# Altium PCB PCB1.PcbDoc
Units mm, origin at the board's own origin, x right, y up, seen from the top; angles counter-clockwise.
Board outline 37.97 x 33.27 mm, 2 copper layers (Top Layer, Bottom Layer); 2 components, 38 nets, 94 pads, 129 vias.
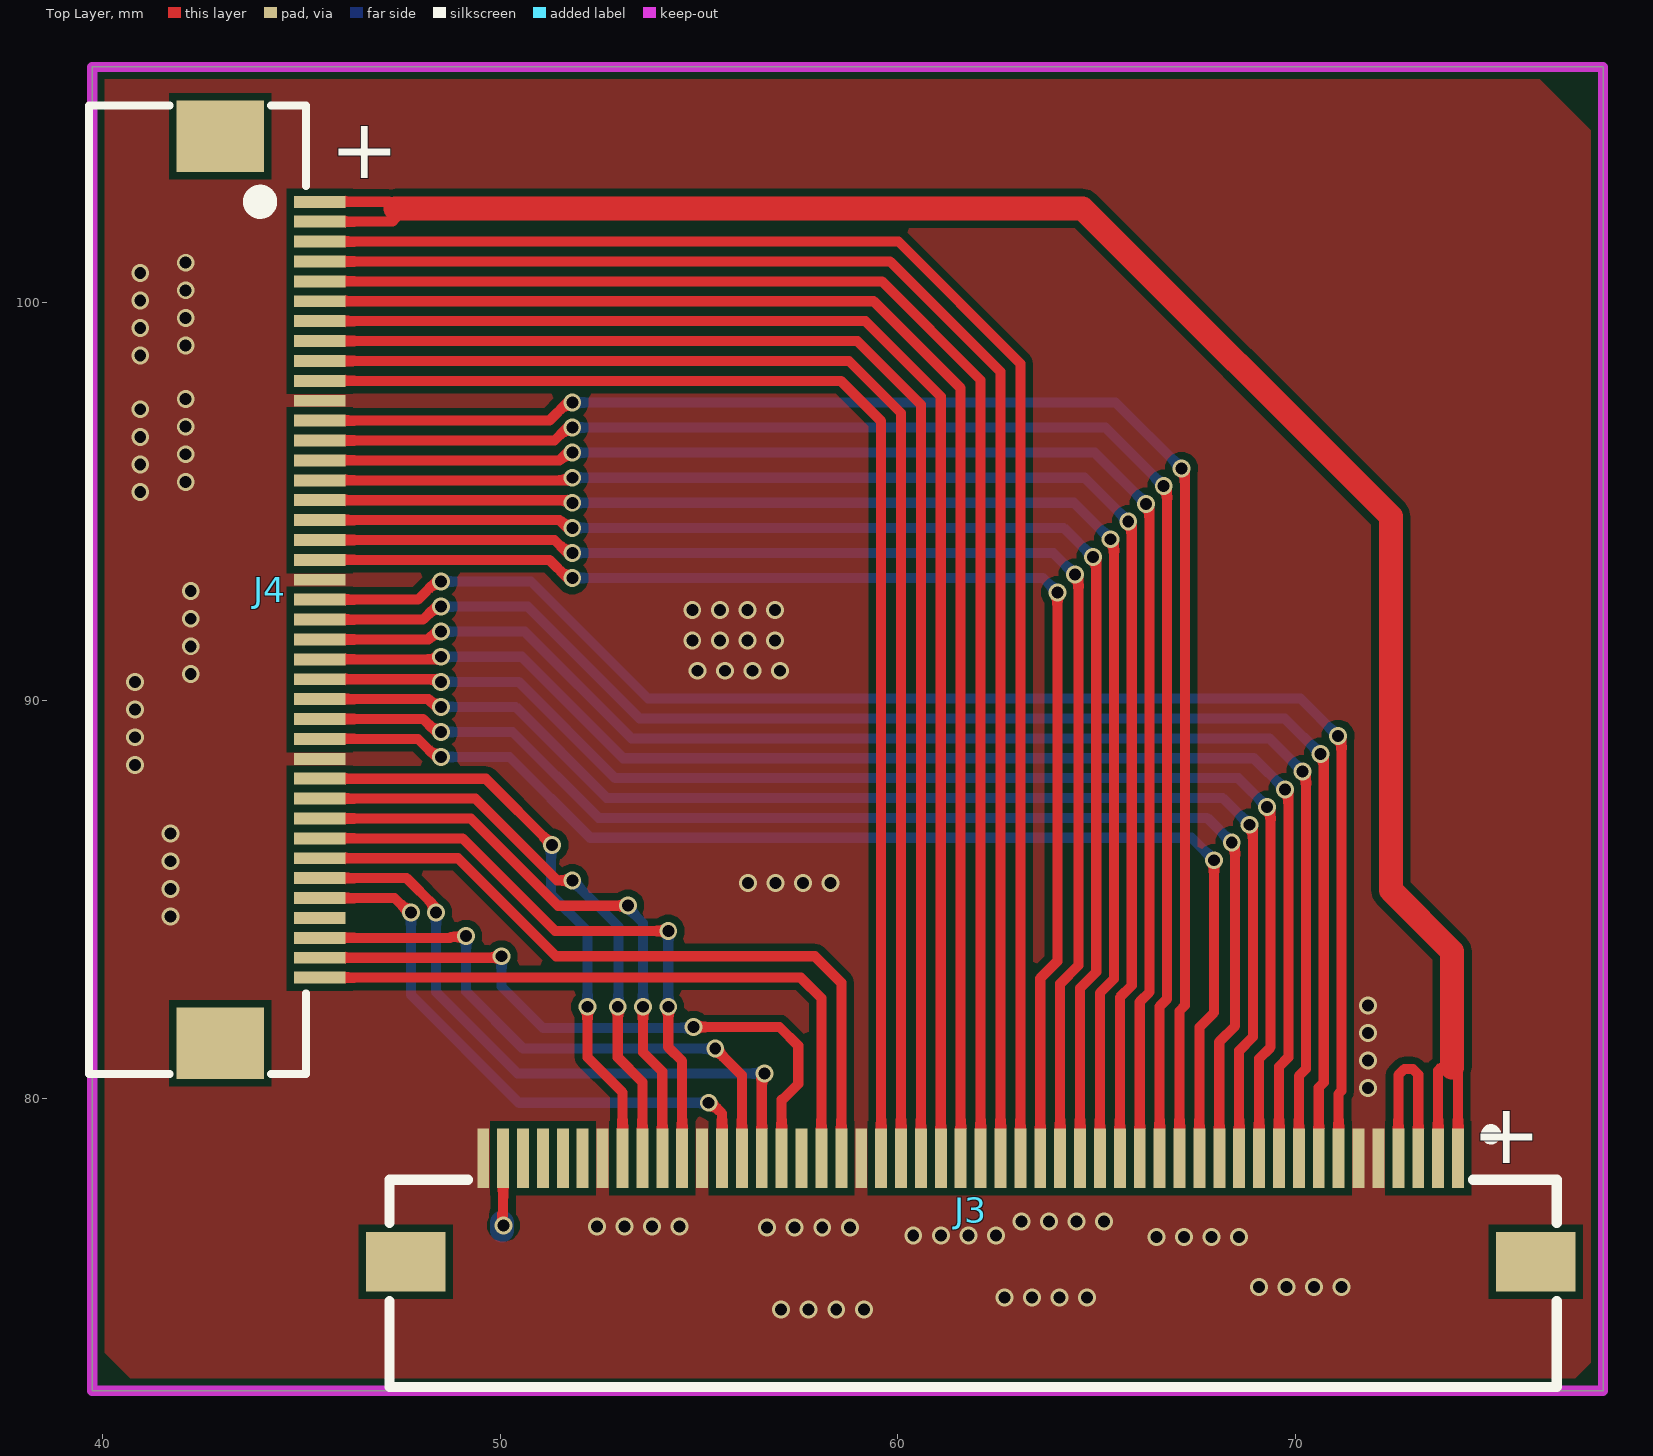
[diagram p0: Top Layer view]
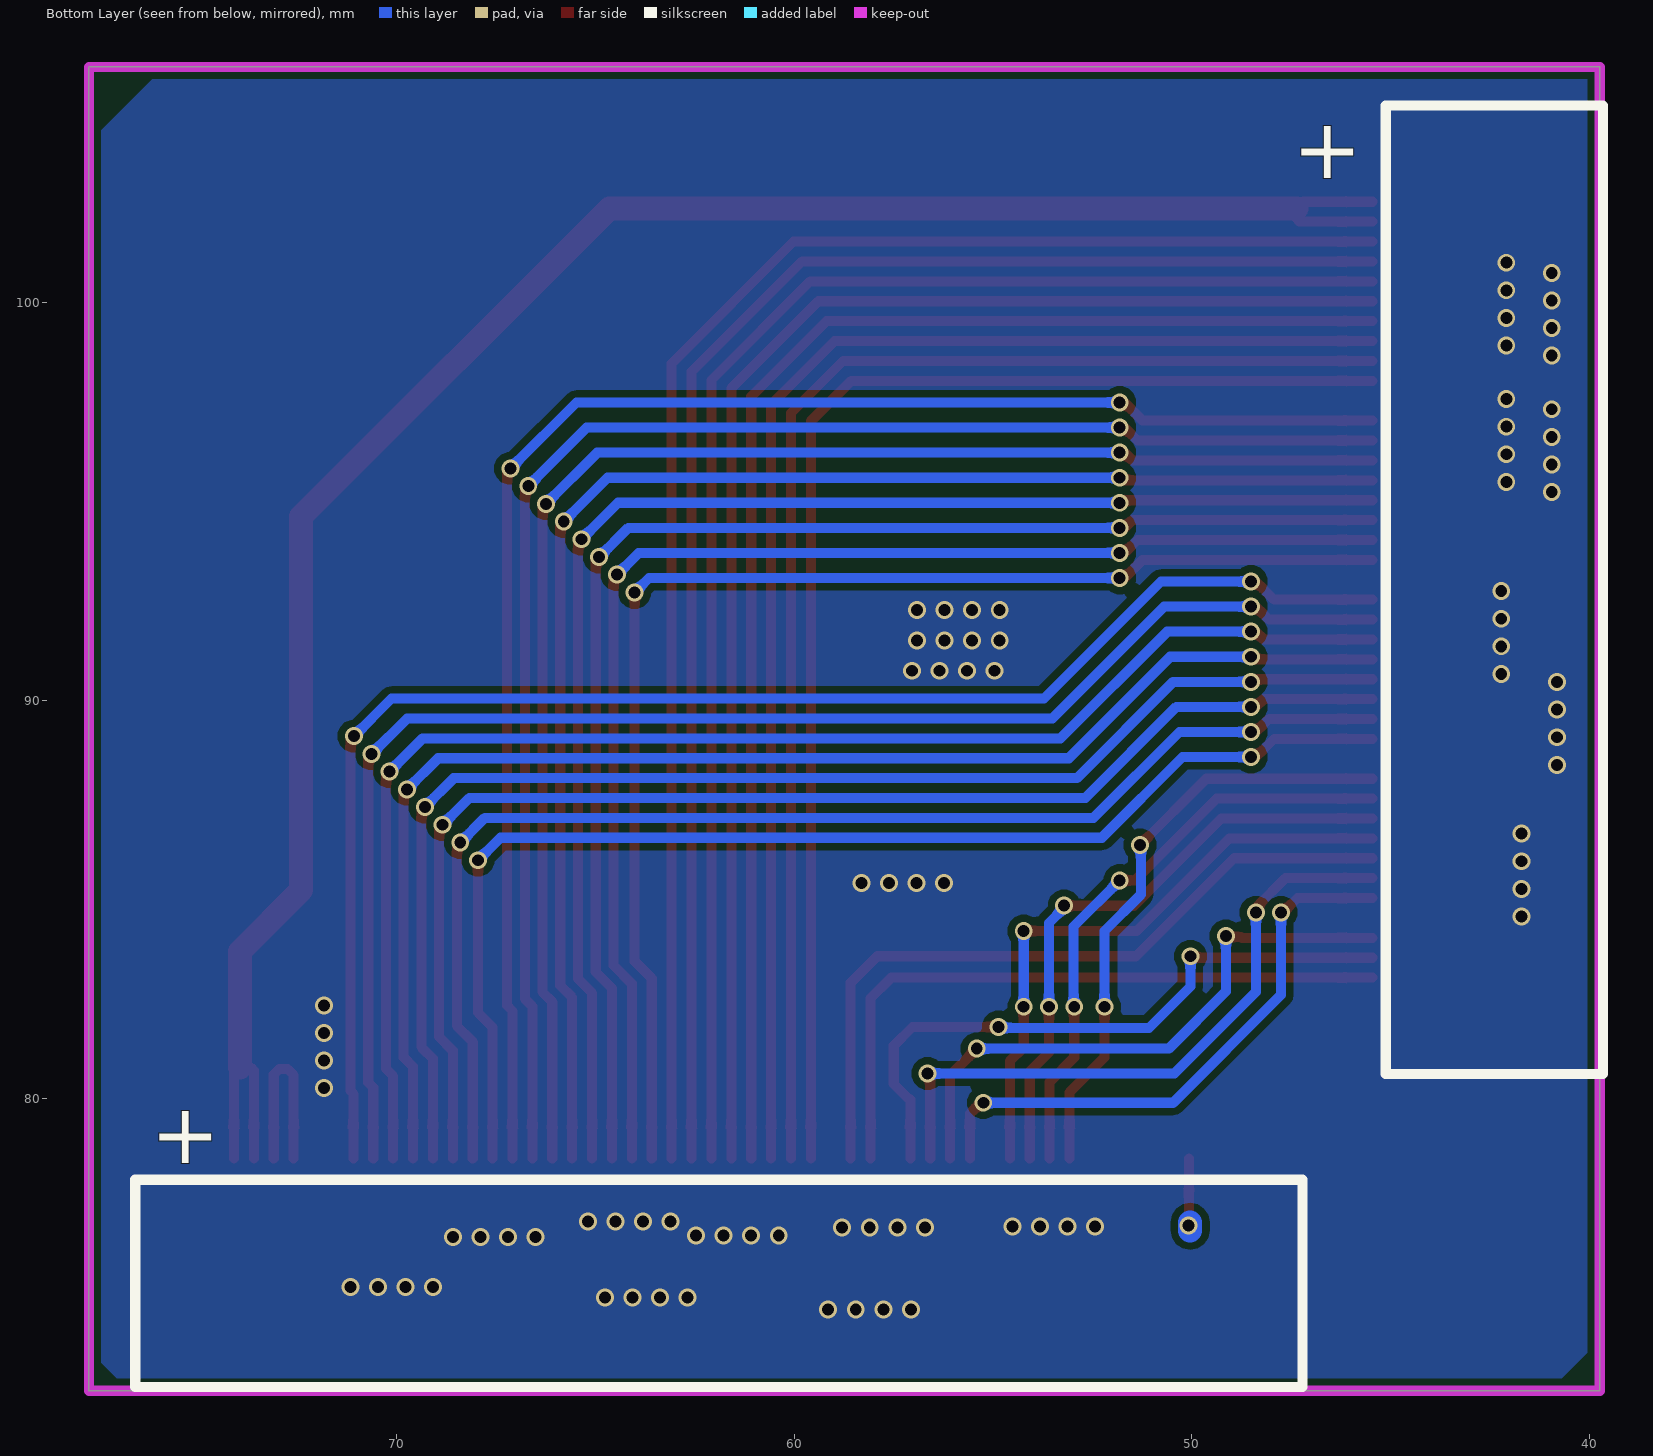
[diagram p1: Bottom Layer view, seen from below]

## Layer stack, top to bottom
Top Solder: solder mask 0.0102, Solder Resist, Dk 3.5
Top Layer: signal copper 0.0356
Dielectric 1: dielectric 0.32, FR-4, Dk 4.8
Bottom Layer: signal copper 0.0356
Bottom Solder: solder mask 0.0102, Solder Resist, Dk 3.5

## Board outline
39.751,72.644 77.724,72.644 77.724,105.918 39.751,105.918

## Design rules (kind name [scope] priority, off if disabled: settings)
Clearance [All] p1: gap=0.18 ignorepadtopadclearanceinfootprint=FALSE
HoleSize [All] p1: absolutevalues=TRUE maxlimit=10 minlimit=0.025 maxpercent=80.000 minpercent=20.000
PolygonConnect [All] p1: connectstyle=Direct reliefconductorwidth=0.254 reliefentries=4 polygonreliefangle="90 Angle" airgapwidth=0.254
RoutingVias [All] p1: holewidth=0.2 width=0.4 viastyle="Through Hole" minholewidth=0.1 minwidth=0.2 maxholewidth=0.4 maxwidth=1
SolderMaskExpansion [All] p1: expansion=0.102 istentingtop=FALSE
Width [All] p1: maxlimit=1 minlimit=0.254 preferedwidth=0.254 minimp=50.000000 maximp=50.000000 favimp=50.000000
29 further rules are at their usual default settings.

## Components (designator, comment, footprint, x,y, rotation, side; value= is the part's Value field where it differs from the comment)
J3 "50PIN0.5后压" FPC-SMD_KH-FG0.5-H2.0-50PIN 61.828,77.186 r180 top
J4 "FPC0.5-40P" FPC0.5-40P 42.969,92.778 r270 top

## Footprints (in the part's own frame and the unit in brackets; to place one, negate y for a bottom-side part, rotate by r counter-clockwise, add the part's x,y. Pads: shape width x height; smd on the part's side, far side on the other; paste and mask are expansions set on the pad)
FPC0.5-40P [mm]
  rect 1.8x2.2 smd: 0(-11.4,0) 0(11.4,0)
  rect 0.3x1.3 smd: 1(-9.75,2.497) 2(-9.25,2.497) 3(-8.75,2.497) 4(-8.25,2.497) 5(-7.75,2.497) 6(-7.25,2.497) 7(-6.75,2.497) 8(-6.25,2.497) 9(-5.75,2.497) 10(-5.25,2.497) 11(-4.75,2.497) 12(-4.25,2.497) 13(-3.75,2.497) 14(-3.25,2.497) 15(-2.75,2.497) 16(-2.25,2.497) 17(-1.75,2.497) 18(-1.25,2.497) 19(-0.75,2.497) 20(-0.25,2.497) 21(0.25,2.497) 22(0.75,2.497) 23(1.25,2.497) 24(1.75,2.497) 25(2.25,2.497) 26(2.75,2.497) 27(3.25,2.497) 28(3.75,2.497) 29(4.25,2.497) 30(4.75,2.497) 31(5.25,2.497) 32(5.75,2.497) 33(6.25,2.497) 34(6.75,2.497) 35(7.25,2.497) 36(7.75,2.497) 37(8.25,2.497) 38(8.75,2.497) 39(9.25,2.497) 40(9.75,2.497)
  silkscreen extent -12.17,-3.3 12.17,2.16, body extent -12.09,-3.23 12.11,2.77, height 2
FPC-SMD_KH-FG0.5-H2.0-50PIN [mm]
  rect 0.3x1.5 smd: 1(-12.25,-1.3) 2(-11.75,-1.3) 3(-11.25,-1.3) 4(-10.75,-1.3) 5(-10.25,-1.3) 6(-9.75,-1.3) 7(-9.25,-1.3) 8(-8.75,-1.3) 9(-8.25,-1.3) 10(-7.75,-1.3) 11(-7.25,-1.3) 12(-6.75,-1.3) 13(-6.25,-1.3) 14(-5.75,-1.3) 15(-5.25,-1.3) 16(-4.75,-1.3) 17(-4.25,-1.3) 18(-3.75,-1.3) 19(-3.25,-1.3) 20(-2.75,-1.3) 21(-2.25,-1.3) 22(-1.75,-1.3) 23(-1.25,-1.3) 24(-0.75,-1.3) 25(-0.25,-1.3) 26(0.25,-1.3) 27(0.75,-1.3) 28(1.25,-1.3) 29(1.75,-1.3) 30(2.25,-1.3) 31(2.75,-1.3) 32(3.25,-1.3) 33(3.75,-1.3) 34(4.25,-1.3) 35(4.75,-1.3) 36(5.25,-1.3) 37(5.75,-1.3) 38(6.25,-1.3) 39(6.75,-1.3) 40(7.25,-1.3) 41(7.75,-1.3) 42(8.25,-1.3) 43(8.75,-1.3) 44(9.25,-1.3) 45(9.75,-1.3) 46(10.25,-1.3) 47(10.75,-1.3) 48(11.25,-1.3) 49(11.75,-1.3) 50(12.25,-1.3)
  rect 2x1.5 smd: 51(14.2,1.3) 52(-14.2,1.3)
  silkscreen extent -14.73,-2.03 14.6,4.45

## Part data
J3: BOM_JLCPCB Part Class="Extended Part", BOM_Manufacturer=null, BOM_Manufacturer Part=50PIN0.5后压, BOM_Supplier=LCSC, BOM_Supplier Part=C9900011403, Contributor=LCSC, spicePre=C, spiceSymbolName=50PIN0.5后压
J4: "贴片"

## Via types
v1: diameter 0.45, hole 0.3, Top Layer to Bottom Layer, tented both sides, 129 vias

## Nets (pads, with @x,y where several pads share a name; then routed paths per layer and width w, separated by ;. In a path a pad name is that pad's centre, name@x,y a point inside that pad or via, vN(x,y) a via of type N, cw(c..) or ccw(c..) an arc to the next point about the centre after c; other vN are vias at no path point)
CTP-INT: J3.35 J4.39 | length 16.5
  Top Layer w0.254: J4.39 50,83.528 v1(50.038,83.566) ; v1(54.864,81.788) 57.023,81.788 57.495,81.316 57.495,80.355 57.098,79.958 57.078,79.958 J3.35
  Bottom Layer w0.254: v1(50.038,83.566) 50.038,82.804 51.078,81.764 54.84,81.764 v1(54.864,81.788)
CTP-RST: J3.36 J4.35 | length 16.6
  Top Layer w0.254: J4.35 47.654,85.528 48.355,84.827 48.355,84.704 v1(48.392,84.667) ; J3.36 56.578,80.501 56.642,80.565 v1(56.642,80.618)
  Bottom Layer w0.254: v1(48.392,84.667) 48.392,82.672 50.446,80.618 v1(56.642,80.618)
CTP-SCL: J3.37 J4.38 | length 15
  Top Layer w0.254: J4.38 48.745,84.028 48.768,84.051 49.126,84.051 v1(49.149,84.074) ; v1(55.41,81.242) 56.078,80.574 J3.37
  Bottom Layer w0.254: v1(49.149,84.074) 49.149,82.677 50.584,81.242 v1(55.41,81.242)
CTP-SDA: J3.38 J4.36 | length 14.7
  Top Layer w0.254: J4.36 47.348,85.028 47.709,84.667 v1(47.762,84.667) ; v1(55.245,79.883) 55.283,79.845 55.35,79.845 55.578,79.617 J3.38
  Bottom Layer w0.254: v1(47.762,84.667) 47.762,82.595 50.474,79.883 v1(55.245,79.883)
GND: J3.5 J3.6 J3.31 J3.39 J3.44 J3.50 J4.11 J4.20 J4.29
  other v1: 57.065,74.691 57.758,74.691 58.451,74.691 59.144,74.691 62.679,74.985 63.371,74.985 64.064,74.985 64.757,74.985 69.073,75.248 69.766,75.248 70.459,75.248 71.152,75.248 66.499,76.514 67.192,76.514 67.885,76.514 68.578,76.514 60.386,76.543 61.079,76.543 61.772,76.543 62.465,76.543 56.712,76.749 57.405,76.749 58.098,76.749 58.791,76.749 52.436,76.772 53.129,76.772 53.822,76.772 54.515,76.772 63.104,76.899 63.797,76.899 64.49,76.899 65.183,76.899 71.818,80.249 71.818,80.942 71.818,81.635 71.818,82.328 41.719,84.567 41.719,85.26 56.229,85.407 56.922,85.407 57.615,85.407 58.308,85.407 41.719,85.953 41.719,86.646 40.83,88.377 40.83,89.07 40.83,89.763 40.83,90.456 42.227,90.663 54.959,90.741 55.652,90.741 56.345,90.741 57.038,90.741 42.227,91.356 54.832,91.503 55.525,91.503 56.218,91.503 56.911,91.503 42.227,92.049 54.832,92.265 55.525,92.265 56.218,92.265 56.911,92.265 42.227,92.742 40.957,95.235 42.1,95.489 40.957,95.928 42.1,96.182 40.957,96.621 42.1,96.875 40.957,97.314 42.1,97.568 40.957,98.664 42.1,98.918 40.957,99.357 42.1,99.611 40.957,100.05 42.1,100.304 40.957,100.743 42.1,100.997
LCD50V: J3.1 J3.2 J4.1 J4.2 | length 51.8
  Top Layer w0.254: J4.2 47.291,102.028 47.371,102.108 47.371,102.362 47.205,102.528 J4.1 ; J3.2 73.578,80.69 73.66,80.772 73.929,80.772 74.078,80.623 J3.1
  Top Layer w0.6: 47.371,102.362 64.643,102.362 72.39,94.615 72.39,85.225 73.929,83.685 73.929,80.772
LCD-D0: J3.7 J4.21 | length 38.1
  Top Layer w0.254: J4.21 47.937,92.528 48.392,92.983 v1(48.514,92.983) ; v1(71.063,89.097) 71.15,89.011 71.15,80.179 71.078,80.107 J3.7
  Bottom Layer w0.254: v1(48.514,92.983) 50.778,92.983 53.718,90.043 70.118,90.043 v1(71.063,89.097)
LCD-D1: J3.8 J4.22 | length 37.1
  Top Layer w0.254: J4.22 48.067,92.028 48.392,92.353 v1(48.514,92.353) ; J3.8 70.578,80.264 70.704,80.391 70.704,88.565 v1(70.618,88.652)
  Bottom Layer w0.254: v1(48.514,92.353) 50.701,92.353 53.511,89.543 69.727,89.543 v1(70.618,88.652)
LCD-D2: J3.9 J4.23 | length 36.1
  Top Layer w0.254: J4.23 48.197,91.528 48.392,91.723 v1(48.514,91.723) ; J3.9 70.078,80.554 70.259,80.736 70.259,88.12 v1(70.172,88.206)
  Bottom Layer w0.254: v1(48.514,91.723) 50.624,91.723 53.304,89.043 69.336,89.043 v1(70.172,88.206)
LCD-D3: J3.10 J4.24 | length 35.1
  Top Layer w0.254: J4.24 48.449,91.028 v1(48.514,91.093) ; J3.10 69.578,80.79 69.813,81.026 69.813,87.674 v1(69.727,87.761)
  Bottom Layer w0.254: v1(48.514,91.093) 50.546,91.093 53.096,88.543 68.945,88.543 v1(69.727,87.761)
LCD-D4: J3.11 J4.25 | length 34.1
  Top Layer w0.254: J4.25 48.449,90.528 v1(48.514,90.463) ; J3.11 69.078,80.99 69.368,81.28 69.368,87.229 v1(69.281,87.315)
  Bottom Layer w0.254: v1(48.514,90.463) 50.469,90.463 52.889,88.043 68.554,88.043 v1(69.281,87.315)
LCD-D5: J3.12 J4.26 | length 33.2
  Top Layer w0.254: J4.26 48.197,90.028 48.392,89.833 v1(48.514,89.833) ; J3.12 68.578,81.19 68.922,81.534 68.922,86.783 v1(68.836,86.87)
  Bottom Layer w0.254: v1(48.514,89.833) 50.392,89.833 52.682,87.543 68.163,87.543 v1(68.836,86.87)
LCD-D6: J3.13 J4.27 | length 32.3
  Top Layer w0.254: J4.27 48.067,89.528 48.392,89.203 v1(48.514,89.203) ; J3.13 68.078,81.413 68.477,81.812 68.477,86.338 v1(68.39,86.424)
  Bottom Layer w0.254: v1(48.514,89.203) 50.315,89.203 52.475,87.043 67.772,87.043 v1(68.39,86.424)
LCD-D7: J3.14 J4.28 | length 31.4
  Top Layer w0.254: J4.28 47.937,89.028 48.392,88.573 v1(48.514,88.573) ; J3.14 67.578,81.781 67.945,82.148 v1(67.945,85.979)
  Bottom Layer w0.254: v1(48.514,88.573) 50.238,88.573 52.268,86.543 67.381,86.543 v1(67.945,85.979)
LCD-D8: J3.15 J4.12 | length 40
  Top Layer w0.254: J4.12 51.239,97.028 51.694,97.483 v1(51.816,97.483) ; J3.15 67.078,82.191 67.213,82.326 67.213,95.689 67.126,95.775 v1(67.126,95.828)
  Bottom Layer w0.254: v1(51.816,97.483) 65.472,97.483 v1(67.126,95.828)
LCD-D9: J3.16 J4.13 | length 39
  Top Layer w0.254: J4.13 51.369,96.528 51.694,96.853 v1(51.816,96.853) ; J3.16 66.578,82.305 66.767,82.495 66.767,95.243 66.681,95.33 v1(66.681,95.383)
  Bottom Layer w0.254: v1(51.816,96.853) 65.211,96.853 v1(66.681,95.383)
LCD-D10: J3.17 J4.14 | length 38
  Top Layer w0.254: J4.14 51.499,96.028 51.694,96.223 v1(51.816,96.223) ; J3.17 66.078,82.419 66.322,82.663 66.322,94.798 66.235,94.884 v1(66.235,94.937)
  Bottom Layer w0.254: v1(51.816,96.223) 64.95,96.223 v1(66.235,94.937)
LCD-D11: J3.18 J4.15 | length 37
  Top Layer w0.254: J4.15 51.751,95.528 v1(51.816,95.593) ; J3.18 65.578,82.533 65.876,82.831 65.876,94.352 65.79,94.439 v1(65.79,94.492)
  Bottom Layer w0.254: v1(51.816,95.593) 64.689,95.593 v1(65.79,94.492)
LCD-D12: J3.19 J4.16 | length 36
  Top Layer w0.254: J4.16 51.751,95.028 v1(51.816,94.963) ; J3.19 65.078,82.646 65.431,82.999 65.431,93.96 v1(65.344,94.046)
  Bottom Layer w0.254: v1(51.816,94.963) 64.428,94.963 v1(65.344,94.046)
LCD-D13: J3.20 J4.17 | length 35.1
  Top Layer w0.254: J4.17 51.499,94.528 51.694,94.333 v1(51.816,94.333) ; J3.20 64.578,82.76 64.985,83.168 64.985,93.514 v1(64.899,93.601)
  Bottom Layer w0.254: v1(51.816,94.333) 64.167,94.333 v1(64.899,93.601)
LCD-D14: J3.21 J4.18 | length 34.2
  Top Layer w0.254: J4.18 51.369,94.028 51.694,93.703 v1(51.816,93.703) ; J3.21 64.078,82.874 64.54,83.336 64.54,93.069 v1(64.453,93.155)
  Bottom Layer w0.254: v1(51.816,93.703) 63.906,93.703 v1(64.453,93.155)
LCD-D15: J3.22 J4.19 | length 33.3
  Top Layer w0.254: J4.19 51.239,93.528 51.694,93.073 v1(51.816,93.073) ; J3.22 63.578,83.009 64.008,83.439 v1(64.008,92.71)
  Bottom Layer w0.254: v1(51.816,93.073) 63.645,93.073 v1(64.008,92.71)
LCD-D16: J3.23 J4.3 | length 38.9
  Top Layer w0.254: J4.3 60.013,101.528 63.078,98.463 J3.23
LCD-D17: J3.24 J4.4 | length 38
  Top Layer w0.254: J4.4 59.806,101.028 62.578,98.256 J3.24
LCD-D18: J3.25 J4.5 | length 37.2
  Top Layer w0.254: J4.5 59.599,100.528 62.078,98.049 J3.25
LCD-D19: J3.26 J4.6 | length 36.4
  Top Layer w0.254: J4.6 59.391,100.028 61.578,97.841 J3.26
LCD-D20: J3.27 J4.7 | length 35.5
  Top Layer w0.254: J4.7 59.184,99.528 61.078,97.634 J3.27
LCD-D21: J3.28 J4.8 | length 34.7
  Top Layer w0.254: J4.8 58.977,99.028 60.578,97.427 J3.28
LCD-D22: J3.29 J4.9 | length 33.9
  Top Layer w0.254: J4.9 58.77,98.528 60.078,97.22 J3.29
LCD-D23: J3.30 J4.10 | length 33.1
  Top Layer w0.254: J4.10 58.563,98.028 59.578,97.013 J3.30
LCD-DE: J3.40 J4.33 | length 15.6
  Top Layer w0.254: J4.33 49.057,86.528 51.384,84.201 v1(54.229,84.201) ; v1(54.229,82.296) 54.229,81.28 54.578,80.931 J3.40
  Bottom Layer w0.254: v1(54.229,82.296) v1(54.229,84.201)
LCD-HSYNC: J3.42 J4.31 | length 14.9
  Top Layer w0.254: J4.31 49.378,87.528 51.435,85.471 v1(51.816,85.471) ; v1(52.959,82.296) 52.959,81.026 53.578,80.407 J3.42
  Bottom Layer w0.254: v1(51.816,85.471) 52.976,84.311 52.976,82.313 v1(52.959,82.296)
LCD-ID: J3.49 | length 1.9
  Top Layer w0.254: v1@50.045,76.877 50.045,77.082 50.078,77.049 J3.49
  Bottom Layer w0.6: v1@50.045,76.673 v1@50.045,76.877
  other v1: 50.089,76.802
LCD-PCLK: J3.43 J4.30 | length 15.2
  Top Layer w0.254: J4.30 49.64,88.028 v1(51.308,86.36) ; v1(52.197,82.296) 52.197,81.026 53.078,80.145 J3.43
  Bottom Layer w0.254: v1(51.308,86.36) 51.284,86.336 51.284,85.114 52.197,84.201 v1(52.197,82.296)
LCD-PWM: J3.32 J4.34 | length 18.8
  Top Layer w0.254: J4.34 48.943,86.028 51.405,83.566 57.912,83.566 58.578,82.9 J3.32
LCD-RESET: J3.33 J4.40 | length 16.9
  Top Layer w0.254: J4.40 57.561,83.028 58.078,82.511 J3.33
LCD-VSYNC: J3.41 J4.32 | length 15.4
  Top Layer w0.254: J4.32 49.264,87.028 51.456,84.836 v1(53.213,84.836) ; v1(53.594,82.296) 53.594,81.153 54.078,80.669 J3.41
  Bottom Layer w0.254: v1(53.213,84.836) 53.213,84.783 53.594,84.402 v1(53.594,82.296)
VDD33: J3.3 J3.4 | length 4.8
  Top Layer w0.254: J3.4 72.578,80.579 72.729,80.73 72.94,80.73 73.078,80.592 J3.3
pads on no net: J3.34 J3.45 J3.46 J3.47 J3.48 J3.51 J3.52 J4.0 J4.37

## Polygon pours and split planes (outlines as drawn)
GND on Top Layer "NONET_L-01_P-001" (solid, pour order 0): 39.751,105.918 75.819,105.918 77.724,104.013 77.724,73.66 76.708,72.644 41.021,72.644 39.624,74.041
GND on Bottom Layer "NONET_L-01_P-001" (solid, pour order 1): 39.751,105.918 75.819,105.918 77.724,104.013 77.724,73.66 76.708,72.644 41.021,72.644 39.624,74.041

## Keep-outs
Keep-Out Layer:
  the board outline again, w0.254

## Silkscreen, mask and mechanical layers (free items; w line width, h text height)
Top Overlay:
  text "+" at 45.72,103.124 h1.52
  text "+" at 74.422,78.359 h1.52
Bottom Overlay:
  lines w0.254: 39.667,80.603 45.128,80.603 45.128,104.953 39.667,104.953 39.667,80.603 ; 47.223,72.741 76.56,72.741 76.56,77.948 47.223,77.948 47.223,72.741
  text "+" at 45.72,103.124 h1.52
  text "+" at 74.422,78.359 h1.52
Top Solder:
  text "↑" at 44.189,75.699 h5 r45
Bottom Solder:
  rectangle: 49.276,75.946 51.435,77.343